# Altium PCB PCB1.PcbDoc
Units mm, origin at the board's own origin, x right, y up, seen from the top; angles counter-clockwise.
Board outline 45.5 x 30 mm, 2 copper layers (Top Layer, Bottom Layer); 19 components, 13 nets, 47 pads, 0 vias.
Unrouted connection lines stored in the file: 6.
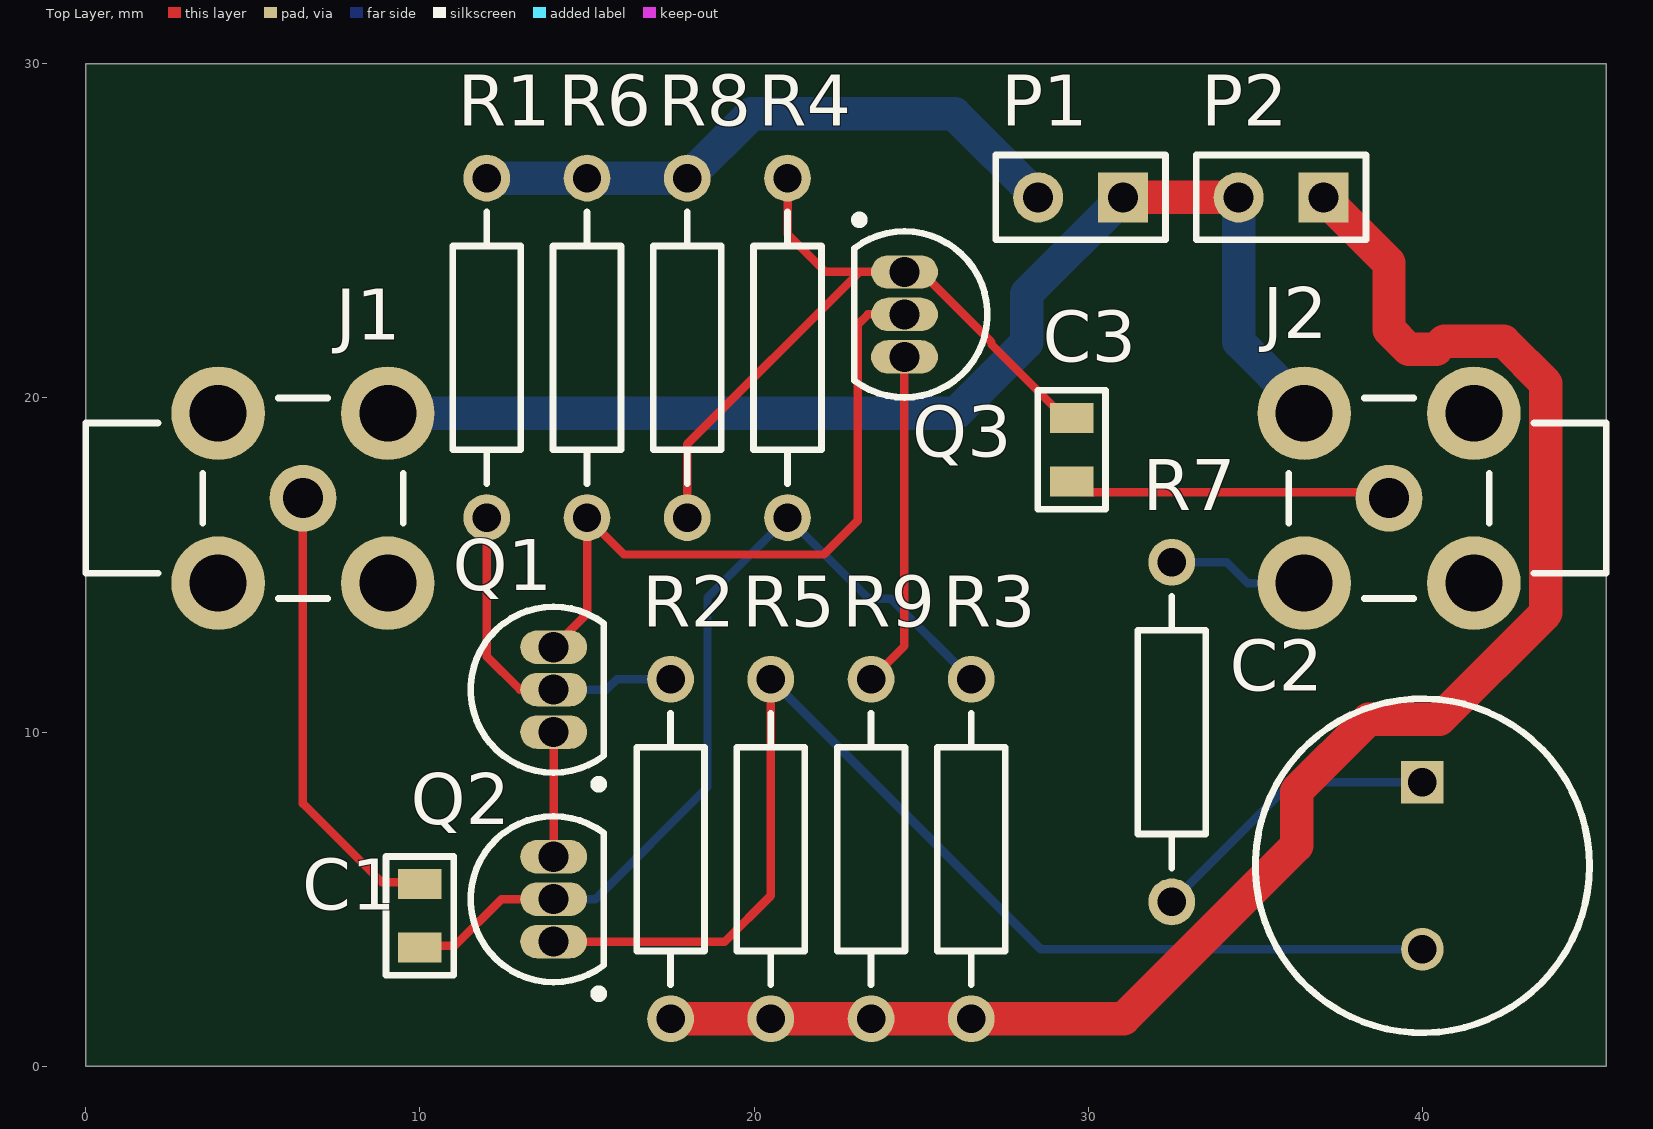
[diagram p0: Top Layer view]
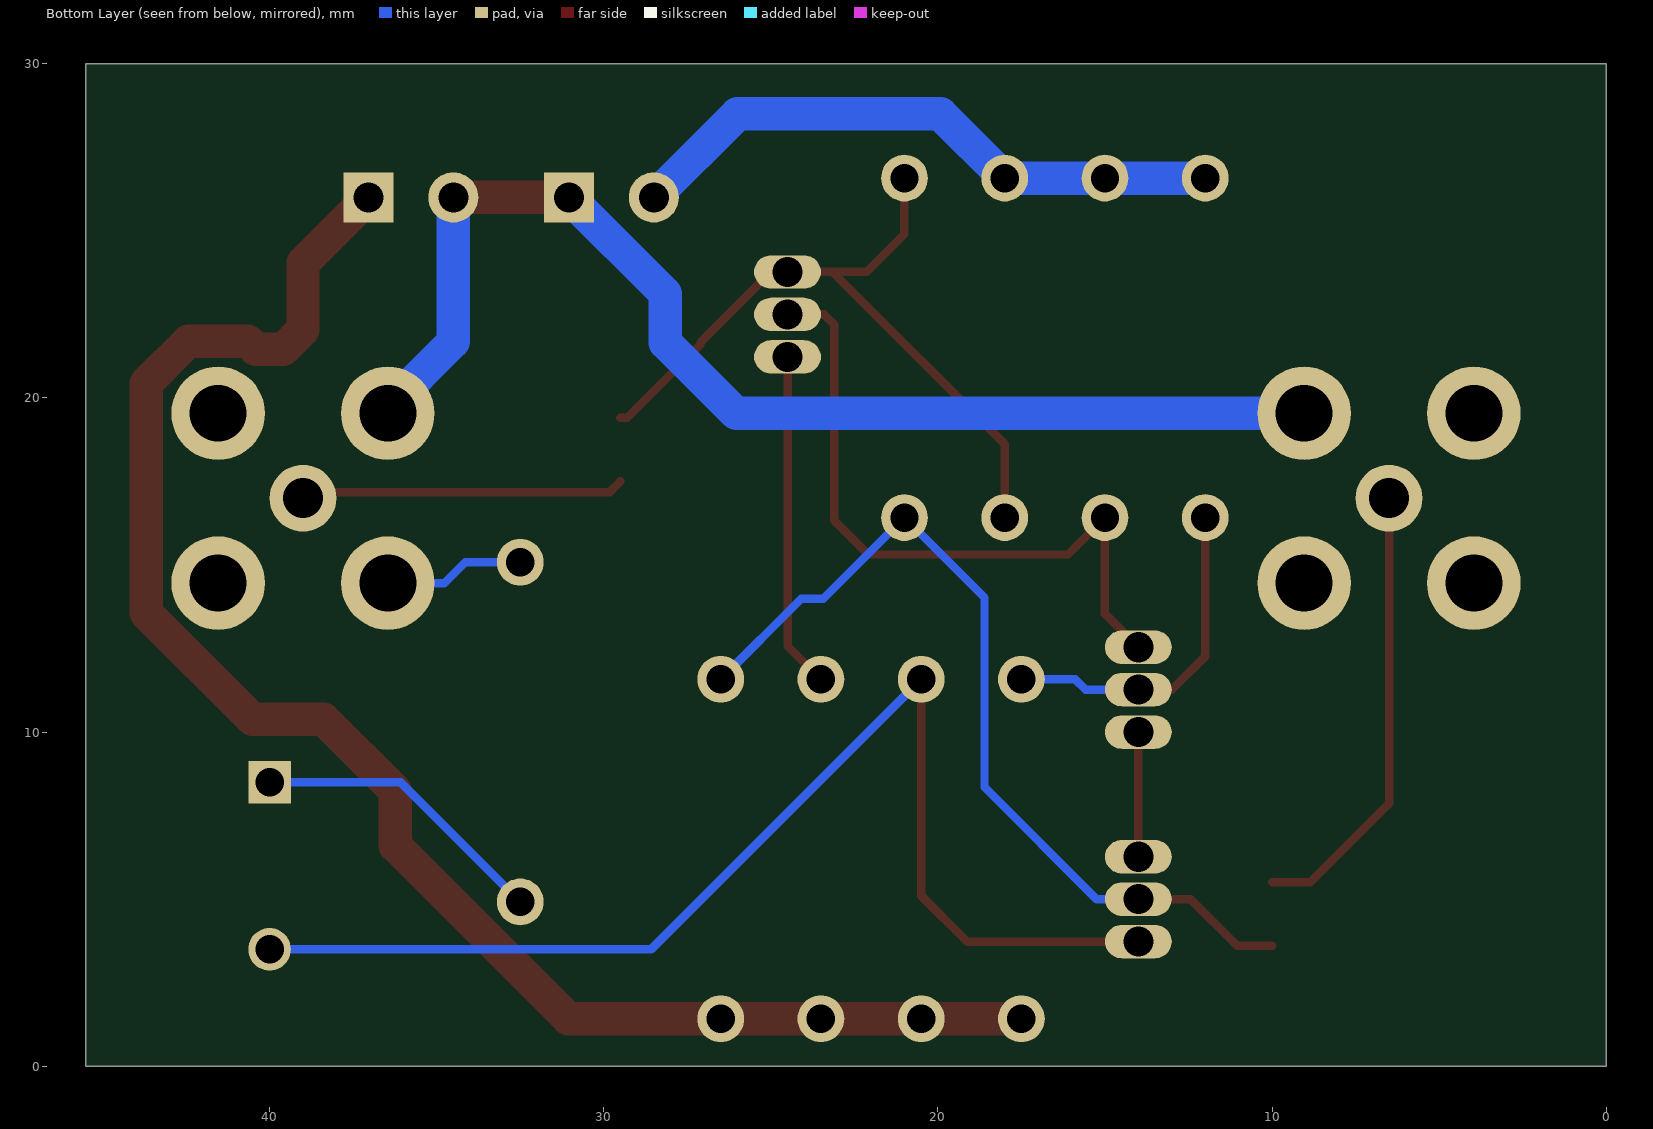
[diagram p1: Bottom Layer view, seen from below]

## Layer stack, top to bottom
Top Solder: solder mask 0.0102, Solder Resist, Dk 3.5
Top Layer: signal copper 0.0356
Dielectric 1: dielectric 0.32, FR-4, Dk 4.8
Bottom Layer: signal copper 0.0356
Bottom Solder: solder mask 0.0102, Solder Resist, Dk 3.5

## Board outline
0,0 0,30 45.5,30 45.5,0

## Design rules (kind name [scope] priority, off if disabled: settings)
Clearance [All] p1: gap=0.254 ignorepadtopadclearanceinfootprint=FALSE except(0: Arc-Hole Track-Hole SMDPad-Hole THPad-Hole Via-Hole Fill-Hole Poly-Hole Region-Hole Text-Hole)
PolygonConnect [All] p1: connectstyle=Relief reliefconductorwidth=0.254 reliefentries=4 polygonreliefangle="90 Angle" airgapwidth=0.254
RoutingTopology [All] p1: topology=Daisy_Balanced
RoutingVias [All] p1: holewidth=0.711 width=1.27 viastyle="Through Hole" minholewidth=0.711 minwidth=1.27 maxholewidth=0.711 maxwidth=1.27
SolderMaskExpansion [All] p1: expansion=0.102 istentingtop=FALSE
Width [All] p1: maxlimit=1 minlimit=0.1 preferedwidth=0.254 minimp=50.000000 maximp=50.000000 favimp=50.000000
29 further rules are at their usual default settings.

## Components (designator, comment, footprint, x,y, rotation, side; value= is the part's Value field where it differs from the comment)
C1 "6.8uF" C0805 10,4.5 r270 top
C2 "EEU-FR1J121" CAPPRD500W65D1000H1750 40,8.5 r270 top
C3 "10uF" C0805 29.5,18.45 r270 top
J1 "COAX-F" MCX5.08-H5 6.5,17 r0 top
J2 "COAX-F" MCX5.08-H5 39,17 r180 top
P1 "Header 2" HDR1X2 31.04,26 r180 top
P2 "Header 2" HDR1X2 37.04,26 r180 top
Q1 "2N3904" TO-92A 14,11.27 r0 top
Q2 "2N3904" TO-92A 14,5 r0 top
Q3 "2N3906" TO-92A 24.5,22.5 r180 top
R1 "Res" AXIAL-0.4 12,21.5 r90 top value=39K
R2 "Res" AXIAL-0.4 17.5,6.5 r90 top value=8.2K
R3 "Res" AXIAL-0.4 26.5,6.5 r90 top value=33K
R4 "Res" AXIAL-0.4 21,21.5 r90 top value=39K
R5 "Res" AXIAL-0.4 20.5,6.5 r90 top value=510
R6 "Res" AXIAL-0.4 15,21.5 r90 top value=1.8K
R7 "Res" AXIAL-0.4 32.5,10 r270 top value=27
R8 "Res" AXIAL-0.4 18,21.5 r90 top value=680
R9 "Res" AXIAL-0.4 23.5,6.5 r90 top value=33K

## Footprints (in the part's own frame and the unit in brackets; to place one, negate y for a bottom-side part, rotate by r counter-clockwise, add the part's x,y. Pads: shape width x height; smd on the part's side, far side on the other; paste and mask are expansions set on the pad)
AXIAL-0.4 [mm] "Axial Device, Thru-Hole; 2 Leads; 0.4 in Pin Spacing"
  round 1.4 hole 0.85: 1(-5.08,0) 2(5.08,0)
  silkscreen extent -4.06,-1.02 4.06,1.02
C0805 [mm]
  rect 0.9x1.3 smd: 1(-0.95,0) 2(0.95,0)
  silkscreen extent -1.78,-1.02 1.78,1.02, body extent -1,-0.6 1,0.6, height 0.95
CAPPRD500W65D1000H1750 [mm]
  rect 1.275x1.275 hole 0.85: 1(0,0)
  round 1.275 hole 0.85: 2(5,0)
  silkscreen extent -2.5,-5 7.5,5, body extent -2.75,-5.24 7.75,5.24, height 17.5
HDR1X2 [mm] "Connector; Header; 2 Position"
  rect 1.5x1.5 hole 0.9: 1(0,0)
  round 1.5 hole 0.9: 2(2.54,0)
  silkscreen extent -1.27,-1.27 3.81,1.27
MCX5.08-H5 [mm] "Connector; RF Coaxial, MCX, Thru-Hole; 5 Position; Right-Angle"
  round 2 hole 1.2: 1(0,0)
  round 2.8 hole 1.7: 2(-2.54,-2.54) 3(2.54,-2.54) 4(2.54,2.54) 5(-2.54,2.54)
  silkscreen extent -6.5,-3 3,3
TO-92A [mm] "TO, Flat Index; 3 In-Line, Axial Leads; Body Dia. 4.5mm; Leads 0.51 x 0.48 mm (max)"
  oval 2x1 hole 0.9: 1(0,-1.27) 2(0,0) 3(0,1.27)
  silkscreen extent -2.48,-2.95 1.5,2.48, body extent -2.48,-2.5 1.5,2.5, height 6.86

## Part data
C1 C3: library part C0805C180J5GACTU, "CAP CER 18PF 50V C0G/NP0 0805", Capacitance=18pF, Case/Package=0805, Dielectric=C0G, Dielectric Material=Ceramic, Manufacturer=KEMET, Max Operating Temperature=125°C, Min Operating Temperature=-55°C, Supplier Part Number 1=399-1112-1-ND, Temperature Coefficient=30ppm/°C, Tolerance=5%, Voltage=50V, Category="Ceramic Capacitors", ComponentLink1Description=https://datasheet.ciiva.com/22746/1769375-22746770.pdf?src-supplier=Element14, ComponentLink1URL=https://datasheet.ciiva.com/22746/1769375-22746770.pdf?src-supplier=Element14, ComponentLink2Description=https://datasheet.ciiva.com/26923/getdatasheetpartid-759702-26923980.pdf?src-supplier=Verical, ComponentLink2URL=https://datasheet.ciiva.com/26923/getdatasheetpartid-759702-26923980.pdf?src-supplier=Verical, ComponentLink3Description=https://datasheet.ciiva.com/26847/getdatasheetpartid-385668-26847862.pdf?src-supplier=Verical, ComponentLink3URL=https://datasheet.ciiva.com/26847/getdatasheetpartid-385668-26847862.pdf?src-supplier=Verical, Contact Plating=Tin,Matte, Depth=1.25mm, Height=0.78mm, Lead Free="Lead Free", Length=2mm, Manufacturer Part Number=C0805C180J5GACTU, Mount="Surface Mount", Packaging="Tape and Reel", Pricing 1="1=0,13000, 10=0,09500, 50=0,05400, 100=0,04470, 500=0,03136, 1000=0,02597 (USD)", Radiation Hardening=No, RoHS=Yes, Stock 1=124325, Supplier 1=Digi-Key, Termination=SMD/SMT, Voltage Rating (DC)=50V
C2: "Capacitor Polarised", Manufacturer_Name=Panasonic, Mouser Part Number=667-EEU-FR1J121, Arrow Part Number=EEU-FR1J121, Arrow Price/Stock=https://www.arrow.com/en/products/eeu-fr1j121/panasonic, Datasheet Link=http://industrial.panasonic.com/cdbs/www-data/pdf/RDF0000/ABA0000C1259.pdf, Height=17.5mm, Manufacturer_Part_Number=EEU-FR1J121, Mouser Price/Stock=https://www.mouser.co.uk/ProductDetail/Panasonic/EEU-FR1J121?qs=55qYoNY87qjRMgy34iDVeg%3D%3D
J1 J2: "RF Coaxial PCB Connector, MCX; Thru-Hole, Right-Angle Mount Socket, Blunt Post Terminal, 50 Ohm Impedance", PackageDocument=04-Jul-1999, ComponentLink1Description="Manufacturer Link", ComponentLink1URL=http://www.amphenolrf.com/, DatasheetDocument=30-May-2003, DrillSize="Corresponds to nominal value.", LatestRevisionDate=15-Jul-2004, LatestRevisionNote="Component Replaced.", PackageReference=919-119J-51AX, PCB_Layout="Complies with manufacturer's recommendation.", Published=15-Jul-2004, Publisher="Altium Limited"
P1 P2: "Header, 2-Pin", LatestRevisionDate=17-Jul-2002, LatestRevisionNote="Re-released for DXP Platform.", Publisher="Altium Limited"
Q1 Q2: "NPN General Purpose Amplifier", ComponentLink1Description="Manufacturer Link", ComponentLink1URL=http://www.fairchildsemi.com/, ComponentLink2Description=Datasheet, ComponentLink2URL=http://www.fairchildsemi.com/ds/2N%2F2N3904.pdf, DatasheetVersion=1997, LatestRevisionDate=15-Jan-2003, LatestRevisionNote="PCB Footprint 'BCY-W3/D4.7' replaced", PackageDescription="TO, Flat Index; 3 In-Line, Axial Leads; Body Dia. 4.5mm; Leads 0.51 x 0.48 mm (max)", PackageReference=TO-92A, PackageVersion=Sep-1998, Published=8-Jun-2000, Publisher="Altium Limited"
Q3: "PNP General Purpose Amplifier", ComponentLink1Description="Manufacturer Link", ComponentLink1URL=http://www.fairchildsemi.com/, ComponentLink2Description=Datasheet, ComponentLink2URL=http://www.fairchildsemi.com/ds/2N%2F2N3906.pdf, DatasheetVersion=1997, LatestRevisionDate=15-Jan-2003, LatestRevisionNote="PCB Footprint 'BCY-W3/D4.7' replaced", PackageDescription="TO, Flat Index; 3 In-Line, Axial Leads; Body Dia. 4.5mm; Leads 0.51 x 0.48 mm (max)", PackageReference=TO-92A, PackageVersion=Sep-1998, Published=8-Jun-2000, Publisher="Altium Limited"
R1 R2 R3 R4 R5 R6 R7 R8 R9: library part Res2, "Resistor", LatestRevisionDate=17-Jul-2002, LatestRevisionNote="Re-released for DXP Platform.", PackageDescription="Axial Device, Thru-Hole; 2 Leads; 0.4 in Pin Spacing", PackageReference=AXIAL-0.4, Published=8-Jun-2000, Publisher="Altium Limited"

## Nets (pads, with @x,y where several pads share a name; then routed paths per layer and width w, separated by ;. In a path a pad name is that pad's centre, name@x,y a point inside that pad or via, vN(x,y) a via of type N, cw(c..) or ccw(c..) an arc to the next point about the centre after c; other vN are vias at no path point)
+12В: P1.2 R1.2 R6.2 R8.2 | length 18.3
  Bottom Layer w1: R1.2 R6.2 R8.2 19.92,28.5 26,28.5 P1.2
-12В: P2.1 R2.1 R3.1 R5.1 R9.1 | length 49.4
  Top Layer w1: R2.1 R5.1 R9.1 R3.1 31.056,1.42 36.235,6.599 36.235,8.235 38.386,10.386 40.512,10.386 43.694,13.568 43.694,20.432 42.432,21.694 40.648,21.694 40.414,21.46 39.586,21.46 39,22.046 39,24.04 P2.1
GND: J1.2 J1.3 J1.4 J1.5 J2.2 J2.3 J2.4 J2.5 P1.1 P2.2 R7.1 | length 40.5
  Top Layer w1: P1.1 P2.2
  Bottom Layer w0.254: R7.1 34.15,15.08 34.77,14.46 J2.4
  Bottom Layer w1: J1.4 26.04,19.54 28.155,21.655 28.155,23.115 P1.1 ; P2.2 34.5,21.681 36.46,19.721 J2.3
In: C1.1 J1.1 | length 13.6
  Top Layer w0.254: J1.1 6.5,7.862 8.862,5.5 C1.1@10,5.5
NetC1_2: C1.2 Q2.2 R3.2 R4.1 | length 27.1
  Top Layer w0.254: C1.2@10,3.6 11.036,3.6 12.436,5 Q2.2
  Bottom Layer w0.254: Q2.2 15.25,5 18.605,8.355 18.605,14.025 R4.1 23.426,13.994 24.086,13.994 R3.2
NetC2_1: C2.1 R7.2 | length 8.5
  Bottom Layer w0.254: R7.2 36.08,8.5 C2.1@39.5,8.5
NetC2_2: C2.2 Q2.1 R5.2 | length 35.9
  Top Layer w0.254: Q2.1 19.126,3.73 20.5,5.104 R5.2
  Bottom Layer w0.254: R5.2 28.58,3.5 C2.2@39.5,3.5
NetC3_1: C3.1 Q3.1 R4.2 R8.1 | length 22
  Top Layer w0.254: R8.1 18,18.618 23.152,23.77 ; R4.2 21,24.906 22.136,23.77 23.152,23.77 ; C3.1 29.3,19.4 27.104,21.596 27.104,21.666 25,23.77 Q3.1 23.152,23.77
NetQ1_1: Q1.1 Q2.3 | length 3.7
  Top Layer w0.254: Q2.3 Q1.1
NetQ1_2: Q1.2 R1.1 R2.2 | length 10.2
  Top Layer w0.254: R1.1 12,12.262 12.992,11.27 Q1.2
  Bottom Layer w0.254: Q1.2 15.583,11.27 15.893,11.58 R2.2
NetQ1_3: Q1.3 Q3.2 R6.1 | length 20.7
  Top Layer w0.254: Q1.3 15,13.54 R6.1 16.105,15.315 22.085,15.315 23.101,16.331 23.101,22.195 23.406,22.5 Q3.2
NetQ3_3: Q3.3 R9.2 | length 10.1
  Top Layer w0.254: R9.2 24.5,12.58 Q3.3
Out: C3.2 J2.1 | length 9.7
  Top Layer w0.254: C3.2 29.823,17.177 38.823,17.177 J2.1

## Silkscreen, mask and mechanical layers (free items; w line width, h text height)
Mechanical 1:
  the board outline again, w0.254